# Altium PCB 18650M.PcbDoc
Units mil, origin at the board's own origin, x right, y up, seen from the top; angles counter-clockwise.
Board outline 4000 x 1250 mil, 2 copper layers (Top Layer, Bottom Layer); 31 components, 15 nets, 85 pads, 16 vias.
Unrouted connection lines stored in the file: 3.
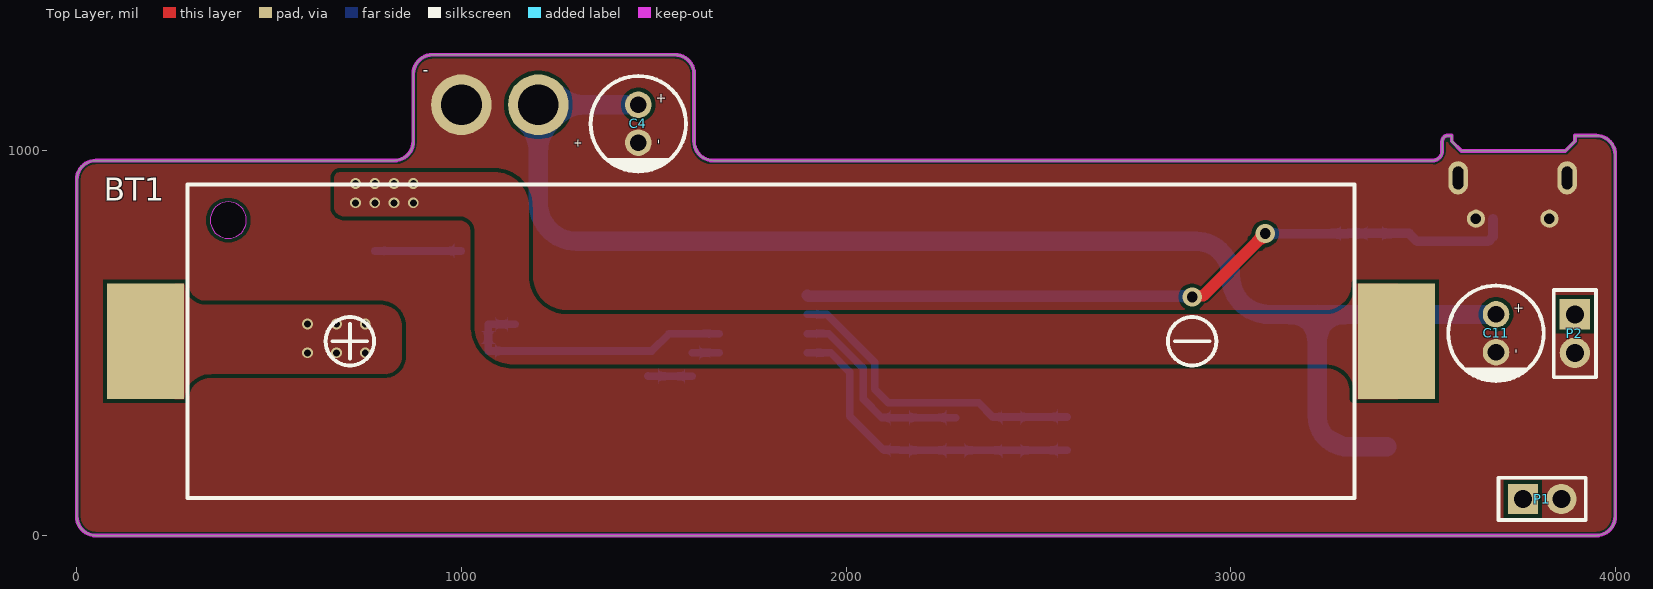
[diagram p0: Top Layer view]
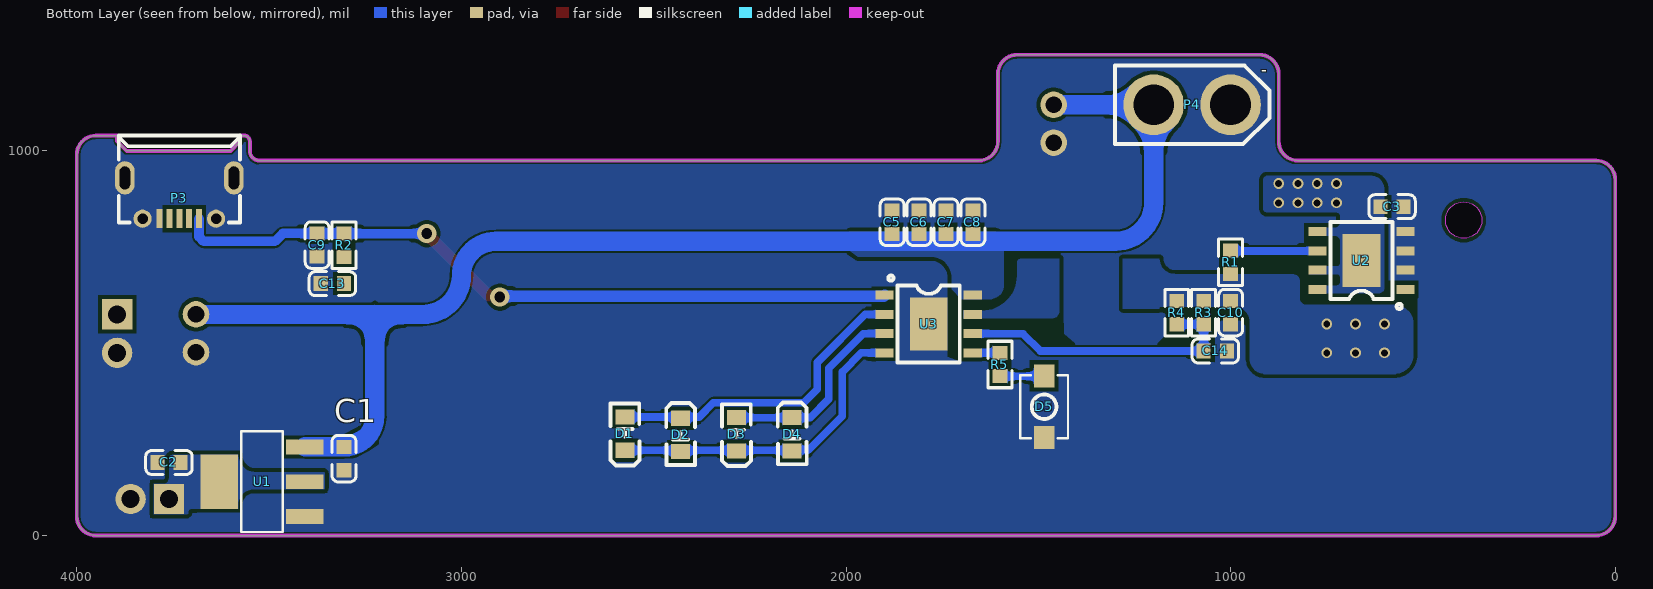
[diagram p1: Bottom Layer view, seen from below]
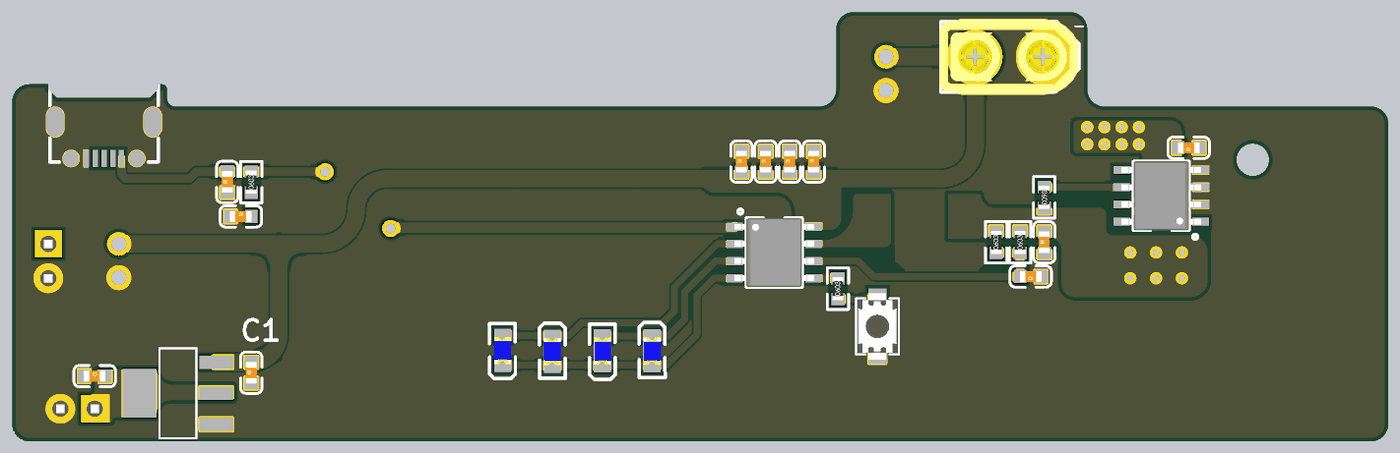
[diagram p2: 3D render of the assembled board from below, using the file's embedded part models]

## Layer stack, top to bottom
Top Solder: solder mask 0.4, Solder Resist, Dk 3.5
Top Layer: signal copper 1.4
Dielectric 1: dielectric 12.6, FR-4, Dk 4.8
Bottom Layer: signal copper 1.4
Bottom Solder: solder mask 0.4, Solder Resist, Dk 3.5

## Board outline
0,50 0,925 cw(c50,925) 50,975 825,975 ccw(c825,1025) 875,1025 875,1200 cw(c925,1200) 925,1250 1555,1250 cw(c1555,1200) 1605,1200 1605,1025 ccw(c1655,1025) 1655,975 3525,975 ccw(c3525,1000) 3550,1000 3550,1025 cw(c3565,1025) 3565,1040 3575,1040 3575,1025 3600,1000 3870,1000 3895,1025 3895,1040 3950,1040 cw(c3950,990) 4000,990 4000,50 cw(c3950,50) 3950,0 50,0 cw(c50,50)

## Design rules (kind name [scope] priority, off if disabled: settings)
Clearance [All] p1: gap=10 ignorepadtopadclearanceinfootprint=FALSE except(0: Arc-Hole Track-Hole SMDPad-Hole THPad-Hole Via-Hole Fill-Hole Poly-Hole Region-Hole Text-Hole; 5: Arc-Arc Arc-Track Arc-SMDPad Arc-THPad Arc-Fill Arc-Poly Arc-Region Track-Track Track-SMDPad Track-THPad Track-Fill Track-Poly Track-Region SMDPad-SMDPad)
PolygonConnect [All] p1: connectstyle=Direct reliefconductorwidth=10 reliefentries=4 polygonreliefangle="90 Angle" airgapwidth=10
RoutingVias [All] p1: holewidth=28 width=50 viastyle="Through Hole" minholewidth=8 minwidth=12 maxholewidth=28 maxwidth=50
SolderMaskExpansion [All] p1: expansion=4 istentingtop=FALSE
Width [All] p1: maxlimit=200 minlimit=10 preferedwidth=10 minimp=50.000000 maximp=50.000000 favimp=50.000000
30 further rules are at their usual default settings.

## Components (designator, comment, footprint, x,y, rotation, side; value= is the part's Value field where it differs from the comment)
BT1 "BH-18650-B1BA002" BATTERY-SMD_18650-1S-L77.1-W20.7-1 1805,505 r90 top
C1 "22uF (226) 20% 6.3V" 0603_C 3305,200 r90 bottom
C2 "22uF (226) 20% 6.3V" 0603_C 3760.31,190 r180 bottom
C3 "2.2uF (225) 10% 16V" 0603_C 580.32,855 r0 bottom
C4 "ULR107M1CE08TUX0CR" CAP-TH_BD6.3-P2.50-D0.6-FD 1460,1070.8 r270 top value=100uF
C5 "22uF (226) 20% 6.3V" 0603_C 1880,814.68 r90 bottom
C6 "22uF (226) 20% 6.3V" 0603_C 1810,814.68 r90 bottom
C7 "22uF (226) 20% 6.3V" 0603_C 1740,814.68 r90 bottom
C8 "22uF (226) 20% 6.3V" 0603_C 1670,814.68 r90 bottom
C9 "10uF (106) 10% 10V" 0603_C 3375,755.32 r90 bottom
C10 "22uF (226) 20% 6.3V" 0603_C 1000,579.68 r90 bottom
C11 "ULR107M1CE08TUX0CR" CAP-TH_BD6.3-P2.50-D0.6-FD 3690,525.8 r270 top value=100uF
C13 "10uF (106) 10% 10V" 0603_C 3335.31,655 r180 bottom
C14 "22uF (226) 20% 6.3V" 0603_C 1039.68,480 r0 bottom
D1 "RF-BGB170TS-CB-E0" LED0805-RD_BLUE 2574.7,265 r90 bottom
D2 "RF-BGB170TS-CB-E0" LED0805-RD_BLUE 2430.07,261.7 r270 bottom
D3 "RF-BGB170TS-CB-E0" LED0805-RD_BLUE 2284.63,263.3 r90 bottom
D4 "RF-BGB170TS-CB-E0" LED0805-RD_BLUE 2140,263.3 r270 bottom
D5 "TS342A2P-WZ" SW-SMD_L4.0-W2.9-LS5.0 1485,334.88 r90 bottom
P1 "Header-Female-2.54_1x2" HDR-TH_2P-P2.54-V-F 3810,95 r0 top
P2 "Header-Female-2.54_1x2" HDR-TH_2P-P2.54-V-F 3895,525 r270 top
P3 "MicroB" MICRO-USB-SMD_5P-P0.65-H-F_C10418 3733.3,876.9 r0 bottom
P4 "Source" XT30-M 1100,1120 r180 bottom
R1 "100Ω (1000) ±1%" 0603_R 1000,710.32 r270 bottom
R2 "2Ω (2R00) ±1%" 0603_R 3305,755 r90 bottom
R3 "1Ω (1R00) ±1%" 0603_R 1070,579.68 r90 bottom
R4 "1Ω (1R00) ±1%" 0603_R 1140,579.68 r90 bottom
R5 "10KΩ (1002) ±1%" 0603_R 1600,444.68 r90 bottom
U1 "AMS1117-3.3_C369933" SOT-223-4_L6.5-W3.5-P2.30-LS7.0-BR 3518.39,140 r180 bottom
U2 "IP3005A" ESOP-8_L4.9-W3.9-P1.27-LS6.0-BL-EP 660,715 r90 bottom
U3 "IP5306" ESOP-8_L4.9-W3.9-P1.27-LS6.0-BL-EP 1785,550 r270 bottom

## Footprints (in the part's own frame and the unit in brackets; to place one, negate y for a bottom-side part, rotate by r counter-clockwise, add the part's x,y. Pads: shape width x height; smd on the part's side, far side on the other; paste and mask are expansions set on the pad)
0603_C [mm]
  rect 0.93x0.98 smd: 1(-0.77,0) 2(0.77,0)
  silkscreen extent -1.53,-0.79 1.54,0.79, body extent -0.8,-0.4 0.8,0.4, height 0.3
0603_R [mm]
  rect 0.93x0.98 smd: 1(-0.77,0) 2(0.77,0)
  silkscreen extent -1.53,-0.79 1.54,0.79, body extent -0.85,-0.4 0.85,0.4, height 0.56
BATTERY-SMD_18650-1S-L77.1-W20.7-1 [mil]
  rect 300x200 smd mask+2: 1(0,-1626.5) 2(0,1626.5)
  Keep-Out Layer board cut-out: 362.2,1411.02 357.53,1431.52 344.42,1447.96 325.47,1457.08 304.45,1457.08 285.5,1447.96 272.39,1431.52 267.72,1411.02 267.72,1411.02 272.39,1390.52 285.5,1374.08 304.45,1364.96 325.47,1364.96 344.42,1374.08 357.53,1390.52 362.2,1411.02
  silkscreen extent -408,-1518 408,1518
CAP-TH_BD6.3-P2.50-D0.6-FD [mil]
  round 68.9 hole 43.3 mask+1.97: 1(-49.2,0) 2(49.2,0)
  silkscreen extent -124,-124 126,124
ESOP-8_L4.9-W3.9-P1.27-LS6.0-BL-EP [mm]
  rect 0.6x1.2 smd mask+0.051: 1(-1.905,-2.908) 2(-0.635,-2.908) 3(0.635,-2.908) 4(1.905,-2.908) 5(1.905,2.908) 6(0.635,2.908) 7(-0.635,2.908) 8(-1.905,2.908)
  rect 3.5x2.5 smd mask+0.051: 9(0,0)
  silkscreen extent -3.2,-2.67 2.55,2.05, body extent -2.55,-2.95 2.55,2.95, height 1.65
HDR-TH_2P-P2.54-V-F [mm]
  rect 2x2 hole 1.2: 1(-1.27,0)
  round 2 hole 1.2: 2(1.27,0)
  silkscreen extent -2.88,-1.39 2.88,1.4, body extent -2.54,-1.27 2.54,1.27, height 8.54
LED0805-RD_BLUE [mil]
  rect 39.4x49.2 smd mask+2: 1(-43.3,0) 2(43.3,0)
  silkscreen extent -83,-37 78,38, body extent -39,-25 39,25, height 46
MICRO-USB-SMD_5P-P0.65-H-F_C10418 [mil]
  oval 51.2x86.6 hole 27.6 slot 59.1 at 90 deg mask+2: 0(-141.7,-53.1) 0(141.7,-53.1)
  round 47.2 hole 27.6 mask+2: 0(-95.5,53.2) 0(95.5,53.2)
  rect 15.7x49.2 smd mask+2: 1(-51.2,53.1) 2(-25.6,53.1) 3(0,53.1) 4(25.6,53.1) 5(51.2,53.1)
  silkscreen extent -158,-163 158,63, body extent -159,-163 159,66, height 107
SOT-223-4_L6.5-W3.5-P2.30-LS7.0-BR [mm]
  rect 2.47x0.98 smd: 1(2.835,-2.3) 2(2.835,0) 3(2.835,2.3)
  rect 2.47x3.6 smd: 4(-2.835,0)
  silkscreen extent -1.37,-3.33 1.37,3.33, body extent -3.32,-3.25 3.68,3.25, height 1.87
SW-SMD_L4.0-W2.9-LS5.0 [mm]
  rect 1.53x1.36 smd mask+0.051: 1(-2.035,0) 2(2.035,0)
  silkscreen extent -2.08,-1.58 2.08,1.58, body extent -2.45,-1.45 2.45,1.45, height 2
XT30-M [mm]
  round 4 hole 2.7: 1(-2.54,0) 2(2.54,0)
  silkscreen extent -5.1,-2.6 5.11,2.6, body extent -5.18,-2.8 5.02,2.8, height 10.66

## Part data
BT1: JLCPCB Part Class="Extended Part", LCSC Part Name=电池盒BH-18650, Manufacturer=MYOUNG(美阳), Add into BOM=yes, Convert to PCB=yes, Datasheet=https://atta.szlcsc.com/upload/public/pdf/source/20220402/870DB99AB50CA0DF8D51CF7C86A51FAB.pdf, Device=BH-18650-B1BA002, Manufacturer Part=BH-18650-B1BA002, Name=BH-18650-B1BA002, Supplier=LCSC, Supplier Footprint=SMD, Supplier Part=C2988620, Symbol=BH-18650-B1BA002
C1 C2 C5 C6 C7 C8 C10 C14: library part "0603 22uF (226) 20% 6.3V", "贴片电容", Package=0603, SuppliersPartNumber=C59461, ComponentLink1Description=供应商链接, ComponentLink1URL=http://www.szlcsc.com/product/details_60514.html, Supplier=LC
C3: library part "0603 2.2uF (225) 10% 16V", "贴片电容", Package=0603, SuppliersPartNumber=C23630, ComponentLink1Description=供应商链接, ComponentLink1URL=http://www.szlcsc.com/product/details_24366.html, Supplier=LC
C4 C11: library part 100uF/16V, Equivalent Series Resistance(ESR)=-, JLCPCB Part Class="Extended Part", LCSC Part Name="100uF ±20% 16V", Lifetime @ Temp=2000hrs@105℃, Manufacturer="MAN YUE(万裕科技)", Operating Temperature=-55℃~+105℃, Rated Voltage=16V, Tolerance=±20%, Add into BOM=yes, Convert to PCB=yes, Datasheet=https://atta.szlcsc.com/upload/public/pdf/source/20211118/585B9CEDE9E08D4A86043C401C7B1F80.pdf, Device=ULR107M1CE08TUX0CR, L=8mm, Lead Spacing=2.5mm, Manufacturer Part=ULR107M1CE08TUX0CR, Name=100uF, Ripple Current=-, Supplier=LCSC, Supplier Footprint=径向引线,6.3x8mm, Supplier Part=C2923568, Symbol=ULR107M1CE08TUX0CR, Type=聚合物, φD=6.3mm
C9 C13: library part "0603 10uF (106) 10% 10V", "贴片电容", Package=0603, SuppliersPartNumber=C19702, ComponentLink1Description=供应商链接, ComponentLink1URL=http://www.szlcsc.com/product/details_20411.html, Supplier=LC
D1 D2 D3 D4: Color Temperature=-, Emitted Color=蓝灯, Forward Current=20mA, JLCPCB Part Class="Extended Part", LCSC Part Name="蓝灯 正贴", Manufacturer=Refond(瑞丰), Operating Temperature=-40℃~+85℃, Power Dissipation=70mW, Add into BOM=yes, Convert to PCB=yes, Datasheet=https://atta.szlcsc.com/upload/public/pdf/source/20211101/C871A18E9B6E101B84BDF0C661245F86.pdf, Device=RF-BGB170TS-CB-E0, Diode Configuration=-, Dominant Wavelength=-, Forward Voltage (VF)=-, Lens Color=-, Luminous Flux (@25℃)=-, Luminous Intensity=-, Manufacturer Part=RF-BGB170TS-CB-E0, Mounting Sytle=正贴, Peak Wavelength=-, Supplier=LCSC, Supplier Footprint=0805, Supplier Part=C2908306, Symbol=RF-BGB170TS-CB-E0, Viewing Angle=140°
D5: JLCPCB Part Class="Extended Part", LCSC Part Name="轻触开关 3*4*2 两脚小龟不带柱 250gf 黑色塑胶按钮", Manufacturer="SHOU HAN(首韩)", Add into BOM=yes, Convert to PCB=yes, Datasheet=https://atta.szlcsc.com/upload/public/pdf/source/20200519/C557591_B3A5A21584733303F06306F18577DA8B.pdf, Device=TS342A2P-WZ, Manufacturer Part=TS342A2P-WZ, Supplier=LCSC, Supplier Footprint=SMD, Supplier Part=C557591, Symbol=TS342A2P-WZ
P1 P2: BOM_JLCPCB Part Class="Extended Part", BOM_Manufacturer=BOOMELE, BOM_Manufacturer Part=2.54-1*2PFemale, BOM_Supplier=LCSC, BOM_Supplier Part=C49661, spicePre=P, spiceSymbolName=Header-Female-2.54_1x2
P3: Current Rating - Power (Max)=1A, JLCPCB Part Class="Extended Part", LCSC Part Name="Micro-B 母座", Manufacturer=精拓金, Manufacturer Part=920-E52A2021S10100, Add into BOM=yes, Connector Type=Micro-B, Convert to PCB=yes, Datasheet=https://atta.szlcsc.com/upload/public/pdf/source/20210305/C10418_4890444E73C7CF5EB311058F76E5ECA4.pdf, Device=920-E52A2021S10100, Gender=母座, Number of Contacts=5, Number of Ports=1, Standard="USB 2.0", Supplier=LCSC, Supplier Footprint=SMD, Supplier Part=C10418, Symbol="micro USBFemale"
P4: library part XT30
R1: library part "0603 100Ω (1000) 1%", "贴片电阻", Package=0603, SuppliersPartNumber=C22775, ComponentLink1Description=供应商链接, ComponentLink1URL=http://www.szlcsc.com/product/details_23502.html, Supplier=LC
R2: library part "0603 2Ω (2R00) 1%", "贴片电阻", Package=0603, SuppliersPartNumber=C22977, ComponentLink1Description=供应商链接, ComponentLink1URL=http://www.szlcsc.com/product/details_23704.html, Supplier=LC
R3 R4: library part "0603 1Ω (1R00) 1%", "贴片电阻", Package=0603, SuppliersPartNumber=C22936, ComponentLink1Description=供应商链接, ComponentLink1URL=http://www.szlcsc.com/product/details_23663.html, Supplier=LC
R5: library part "0603 10KΩ (1002) 1%", "贴片电阻", Package=0603, SuppliersPartNumber=C25804, ComponentLink1Description=供应商链接, ComponentLink1URL=http://www.szlcsc.com/product/details_26547.html, Supplier=LC
U1: BOM_JLCPCB Part Class="Extended Part", BOM_Manufacturer=KEXIN, BOM_Manufacturer Part=AMS1117-3.3, BOM_Supplier=LCSC, BOM_Supplier Part=C369933, Contributor=LCSC, spicePre=U, spiceSymbolName=AMS1117-3.3_C369933
U2 U3: Battery Pack Voltage=-, JLCPCB Part Class="Extended Part", Manufacturer=INJOINIC(英集芯), Add into BOM=yes, Battery Chemistry=-, Charge Current - Max=-, Convert to PCB=yes, Interface=-, Number of Cells=-, Supplier=LCSC, Supplier Footprint=ESOP-8, Voltage - Supply (Max)=-
  U2: Datasheet=https://atta.szlcsc.com/upload/public/pdf/source/20181019/C181685_8FCD62B90ABBC24A3EFF28CA6DF89AAB.pdf, Device=IP3005A, LCSC Part Name=IP3005A, Manufacturer Part=IP3005A, Name=IP3005A, Supplier Part=C181685, Symbol=IP3005A
  U3: Datasheet=https://atta.szlcsc.com/upload/public/pdf/source/20180920/C181692_842C9BF636DF123BB66E91FC1AD6F13F.pdf, Device=IP5306, LCSC Part Name=IP5306, Manufacturer Part=IP5306, Name=IP5306, Supplier Part=C181692, Symbol=IP5306

## Via types
v1: diameter 28, hole 18, Top Layer to Bottom Layer, 14 vias
v2: diameter 50, hole 28, Top Layer to Bottom Layer, 2 vias

## Nets (pads, with @x,y where several pads share a name; then routed paths per layer and width w, separated by ;. In a path a pad name is that pad's centre, name@x,y a point inside that pad or via, vN(x,y) a via of type N, cw(c..) or ccw(c..) an arc to the next point about the centre after c; other vN are vias at no path point)
+3V3: C2.2 P1.1 U1.2 U1.4
GND: C1.1 C2.1 C3.1 C4.2 C5.2 C6.2 C7.2 C8.2 C9.1 C10.1 C11.2 C13.1 C14.1 D5.1 P1.2 P2.2 P3.0 P3.5 P4.2 U1.1 U2.2 U2.3 U2.4 U3.9
NetBT1_1: BT1.1 C3.2 U2.5 U2.7 U2.8 U2.9
  other v1: 725,865 775,865 825,865 875,865 725,915 775,915 825,915 875,915
NetC9_2: C9.2 P3.1 R2.2 U3.1 | length 1913.5
  Top Layer w30: v2(2900,620) 2903.83,623.83 2928.83,623.83 v2(3090,785)
  Bottom Layer w25: v2(3090,785) 3305,785 3305.47,785.47 3374.84,785.47 C9.2 3464.37,785.63 3485,765 3670,765 3682.1,777.1 P3.1
  Bottom Layer w30: U3.1 1902,622.5 2897.5,622.5 v2(2900,620)
NetC13_2: C13.2 R2.1
NetC14_2: C14.2 R3.1 R4.1 U3.6 | length 758.5
  Bottom Layer w20: R4.1 R3.1 C14.2 1495,480 1540,525 U3.6
NetD1_1: D1.1 D2.2 D3.1 D4.2 U3.4 | length 847.5
  Bottom Layer w20: U3.4 1960,475 2010,425 2010,310 2097.12,222.88 2138.82,222.88 2140,221.7 2284.63,221.7 2430.07,221.7 D1.1
NetD1_2: D1.2 D2.1 U3.2 | length 826.7
  Bottom Layer w20: U3.2 1950,575 2075,450 2075,380 2110,345 2345,345 2381.7,308.3 D1.2
NetD3_2: D3.2 D4.1 U3.3 | length 522.5
  Bottom Layer w20: U3.3 1955,525 2045,435 2045,355 2093.4,306.6 D4.1 D3.2
NetD5_2: D5.2 R5.1 | length 115.3
  Bottom Layer w20: D5.2 1485.63,414.37 R5.1
NetL1_1: U3.7
NetR1_1: R1.1 U2.6 | length 226.1
  Bottom Layer w20: U2.6 1000,740 R1.1
NetR5_2: R5.2 U3.5 | length 70.5
  Bottom Layer w20: R5.2 U3.5
PP: BT1.2 C10.2 R1.2 R3.2 R4.2
  other v1: 600,475 675,475 750,475 600,550 675,550 750,550
VIN: C1.2 C4.1 C5.1 C6.1 C7.1 C8.1 C11.1 P2.1 P4.1 U1.3 U3.8 | length 3662.9
  Bottom Layer w50: C4.1 P4.1 1200,865 ccw(c1300,865) 1300,765 1880,765 2675,765 2910,765 cw(c2910,675) 3000,675 ccw(c3100,675) 3100,575 3225,575 ; U1.3 3305,230.55 C1.2 cw(c3305,310.32) 3225,310.32 3225,575 ; C11.1 3225,575
pads on no net: P3.2 P3.3 P3.4 U2.1

## Polygon pours and split planes (outlines as drawn)
GND on Bottom Layer "BOTTOM_GND" (solid, remove dead copper, pour order 27): 0,50 0,925 cw(c50,925) 50,975 825,975 ccw(c825,1025) 875,1025 875,1200 cw(c925,1200) 925,1250 1555,1250 cw(c1555,1200) 1605,1200 1605,1025 ccw(c1655,1025) 1655,975 3525,975 ccw(c3525,1000) 3550,1000 3550,1025 cw(c3565,1025) 3565,1040 3575,1040 3575,1025 3600,1000 3870,1000 3895,1025 3895,1040 3950,1040 cw(c3950,990) 4000,990 4000,50 cw(c3950,50) 3950,0 50,0 cw(c50,50)
VIN on Bottom Layer "VIN_L02_P007" (solid, remove dead copper, pour order 7): 1990,790 1615,790 ccw(c1615,765) 1590,765 1590,650 ccw(c1625,650) 1625,615 1700,615 1725,640 1725,670 cw(c1780,670) 1780,725 1970,725 1990,740
NetL1_1 on Bottom Layer "NETL1_1_L02_P006" (solid, pour order 6): 1695,565 1465,565 cw(c1465,585) 1445,585 1445,720 1545,720 cw(c1545,710) 1555,710 1555,675 ccw(c1645,675) 1645,585 1695,585
+3V3 on Bottom Layer "Bottom Layer-+3V3" (solid, pour order 21): 3725,55 3715,55 cw(c3715,60) 3710,60 ccw(c3700,60) 3700,70 3580,70 3580,80 ccw(c3540,80) 3540,120 3360,120 cw(c3360,125) 3355,125 3355,160 cw(c3360,160) 3360,165 3535,165 ccw(c3535,210) 3580,210 3750,210 cw(c3750,200) 3760,200 3760,150 ccw(c3775,150) 3775,135 3800,135 3800,55
NetBT1_1 on Bottom Layer "NETBT1_1_L02_P013" (solid, pour order 13): 895.98,934.9 905.1,934.9 cw(c905.1,925) 915,925 915,850 cw(c905,850) 905,840 895,840 725,840 ccw(c725,830) 715,830 715,815 ccw(c730,815) 730,800 790,800 790,780 730,780 ccw(c730,765) 715,765 715,710 ccw(c725,710) 725,700 795,700 795,680 725,680 ccw(c725,670) 715,670 715,660 ccw(c725,660) 725,650 795,650 795,630 615,630 cw(c615,645) 600,645 600,900 cw(c635,900) 635,935 895,935 cw(c895,930.02)
PP on Bottom Layer "Bottom Layer-PP" (solid, pour order 10): 803.43,600.17 ccw(c803.43,616.74) 820,616.74 820,660 cw(c840,660) 840,680 920,680 945,680 1145,680 ccw(c1145,720) 1185,720 1280,720 1280,590 1185,590 ccw(c1165.04,590.01) 1184.36,595 990,595 ccw(c990,555) 950,555 950,460 cw(c910,460) 910,420 575,420 cw(c575,470) 525,470 cw(c575.13,472.5) 525,475 525,550 cw(c575,550) 575,600 800,600 ccw(c800,635.01)
GND on Top Layer "TOP_GND" (solid, remove dead copper, pour order 26): 0,50 0,925 cw(c50,925) 50,975 825,975 ccw(c825,1025) 875,1025 875,1200 cw(c925,1200) 925,1250 1555,1250 cw(c1555,1200) 1605,1200 1605,1025 ccw(c1655,1025) 1655,975 3525,975 ccw(c3525,1000) 3550,1000 3550,1025 cw(c3565,1025) 3565,1040 3575,1040 3575,1025 3600,1000 3870,1000 3895,1025 3895,1040 3950,1040 cw(c3950,990) 4000,990 4000,50 cw(c3950,50) 3950,0 50,0 cw(c50,50)
NetBT1_1 on Top Layer "NETBT1_1_L01_P015" (solid, pour order 15): 670,855 ccw(c695,855) 695,830 995,830 cw(c995,790) 1035,790 1035,545 ccw(c1135,545) 1135,445 1140,445 3250,445 cw(c3250,375) 3320,375 3320,355 3435,355 3435,655 3325,655 cw(c3245,655) 3245,575 1275,575 cw(c1275,675) 1175,675 1175,847.5 ccw(c1087.54,847.5) 1174.58,856.08 ccw(c1085.89,856.31) 1086.12,945 685,945 ccw(c685,930) 670,930
PP on Top Layer "PP_L01_P008" (solid, pour order 8): 280,655 255,655 255,355 280,355 cw(c347.5,352.5) 350,420 800,420 ccw(c800,465) 845,465 845,545 ccw(c790,545) 790,600 335,600 cw(c335,655)

## Keep-outs
Keep-Out Layer:
  lines w10: 3040,975 1655,975 cw(c1655,1025) 1605,1025 1605,1200 ccw(c1555,1200) 1555,1250 925,1250 ccw(c925,1200) 875,1200 875,1025 cw(c825,1025) 825,975 50,975 ccw(c50,925) 0,925 0,525 0,50 ccw(c50,50) 50,0 280,0 3950,0 ccw(c3950,50) 4000,50 4000,990 ccw(c3950,990) 3950,1040 3895,1040 3895,1025 3870,1000 3850,1000 3600,1000 3575,1025 3575,1040 3565,1040 ccw(c3565,1025) 3550,1025 3550,1000 cw(c3525,1000) 3525,975 3500,975 3375,975 3045,975

## Other copper
Bottom Layer:
  pour cut-out: 960,545 975,560 1025,560 1040,545 1040,580.98 1040.71,581.69 1037.6,584.8 1029.29,584.8 1029.29,581.69 976.43,581.69 975.97,581.24 ccw(c975.97,565.27) 960,565.27
  pour cut-out: 514.8,554.92 515,555.12 515,615.07 511.88,618.19 513.69,620 565,620 579.12,634.12 579.12,661.81 593.19,661.81 595,660 595,639.8 ccw(c615,639.8) 615,619.8 806.51,619.8 cw(c806.51,618.19) 808.12,618.19 808.12,661.81 740.88,661.81 740.88,660.2 725.2,660.2 725.2,669.46 725.54,669.46 725.54,669.8 740.88,669.8 740.88,668.19 808.12,668.19 808.12,711.81 740.88,711.81 740.88,710.2 725.2,710.2 725.2,764.5 cw(c730.5,764.5) 730.5,769.8 740.88,769.8 740.88,768.19 808.12,768.19 808.12,761.81 740.88,761.81 740.88,718.19 808.12,718.19 808.12,609.86 579.94,609.86 ccw(c579.94,554.92) 525,554.92
  pour cut-out: 1865.88,503.19 1933.12,503.19 1933.12,504.61 1946.55,504.61 1951.15,500.01 1949.24,495.39 1933.12,495.39 1933.12,496.81 1865.88,496.81
  pour cut-out: 1865.88,553.19 1933.12,553.19 1933.12,554.61 1941.55,554.61 1946.15,550.01 1944.24,545.39 1933.12,545.39 1933.12,546.81 1865.88,546.81
  pour cut-out: 1865.88,603.19 1933.12,603.19 1933.12,596.81 1865.88,596.81
  pour cut-out: 1735.2,640 1734.42,636.1 1732.21,632.79 1707.21,607.79 1704.12,605.73 1704.12,603.19 1636.88,603.19 1636.88,604.8 1623.76,604.8 1621.59,599.8 1622.82,598.49 1635.78,595.91 1636.88,596.81 1704.12,596.81 1704.12,589.35 1704.42,588.9 1705.2,585 1705.2,565 1704.42,561.1 1704.12,560.65 1704.12,503.19 1636.88,503.19 1634.14,503.67 1629.98,500.72 1629.91,498.59 1633.88,496.1 1636.88,496.81 1704.12,496.81 1704.12,453.19 1735,465
  pour cut-out: 1435,595 1434.41,524.7 1405,500 1486.55,500.39 1525.58,539.42 1532.2,543.84 1540,545.39 1636.88,545.39 1636.88,546.81 1704.12,546.81 1704.12,553.19 1636.88,553.19 1636.88,554.8 1461.02,554.8 1449.77,558.62 1440.84,566.46 1435.58,577.12
  pour cut-out: 1103.51,500.39 1102.17,500.5 1098.31,501.09 1098.31,509.29 1091.11,509.29 1090.82,510.59 1090.39,514.78 1090.39,521.06 1099.29,521.06 1099.29,528.98 1105.84,528.98 1106.97,528.9 1109.24,528.59 1110.71,528.26 1110.71,521.06 1169.29,521.06 1190,500 1169.29,521.06 1190,500
  pour cut-out: 1169.29,575.04 1173.41,579.8 1169.29,579.8
  pour cut-out: 1186,579.8 1185.75,579.85 1185,579.85 1184.27,580 1184.01,580 1183.76,580.05 1175.8,580.05 1175.8,580.18 1170.8,581.84 1169.29,579.8
  pour cut-out: 1040.71,521.06 1041.69,450.71 1098.31,450.71 1098.31,458.74 1090,460 1050,460 1049.61,521.06

## Text inside footprints (layer, text, board x,y; h text height)
C4: Top Overlay "-" at 1503.65,1030.8 h25.76 r270; Top Overlay "+" at 1508.65,1150.8 h25.76 r270
C11: Top Overlay "-" at 3733.65,485.8 h25.76 r270; Top Overlay "+" at 3738.65,605.8 h25.76 r270
P4: Top Overlay "-" at 900,1197 h30; Top Overlay "+" at 1292.11,1010.76 h20; Bottom Overlay "-" at 920,1197 h30